# EAGLE board acdc (EAGLE 7.2.0)
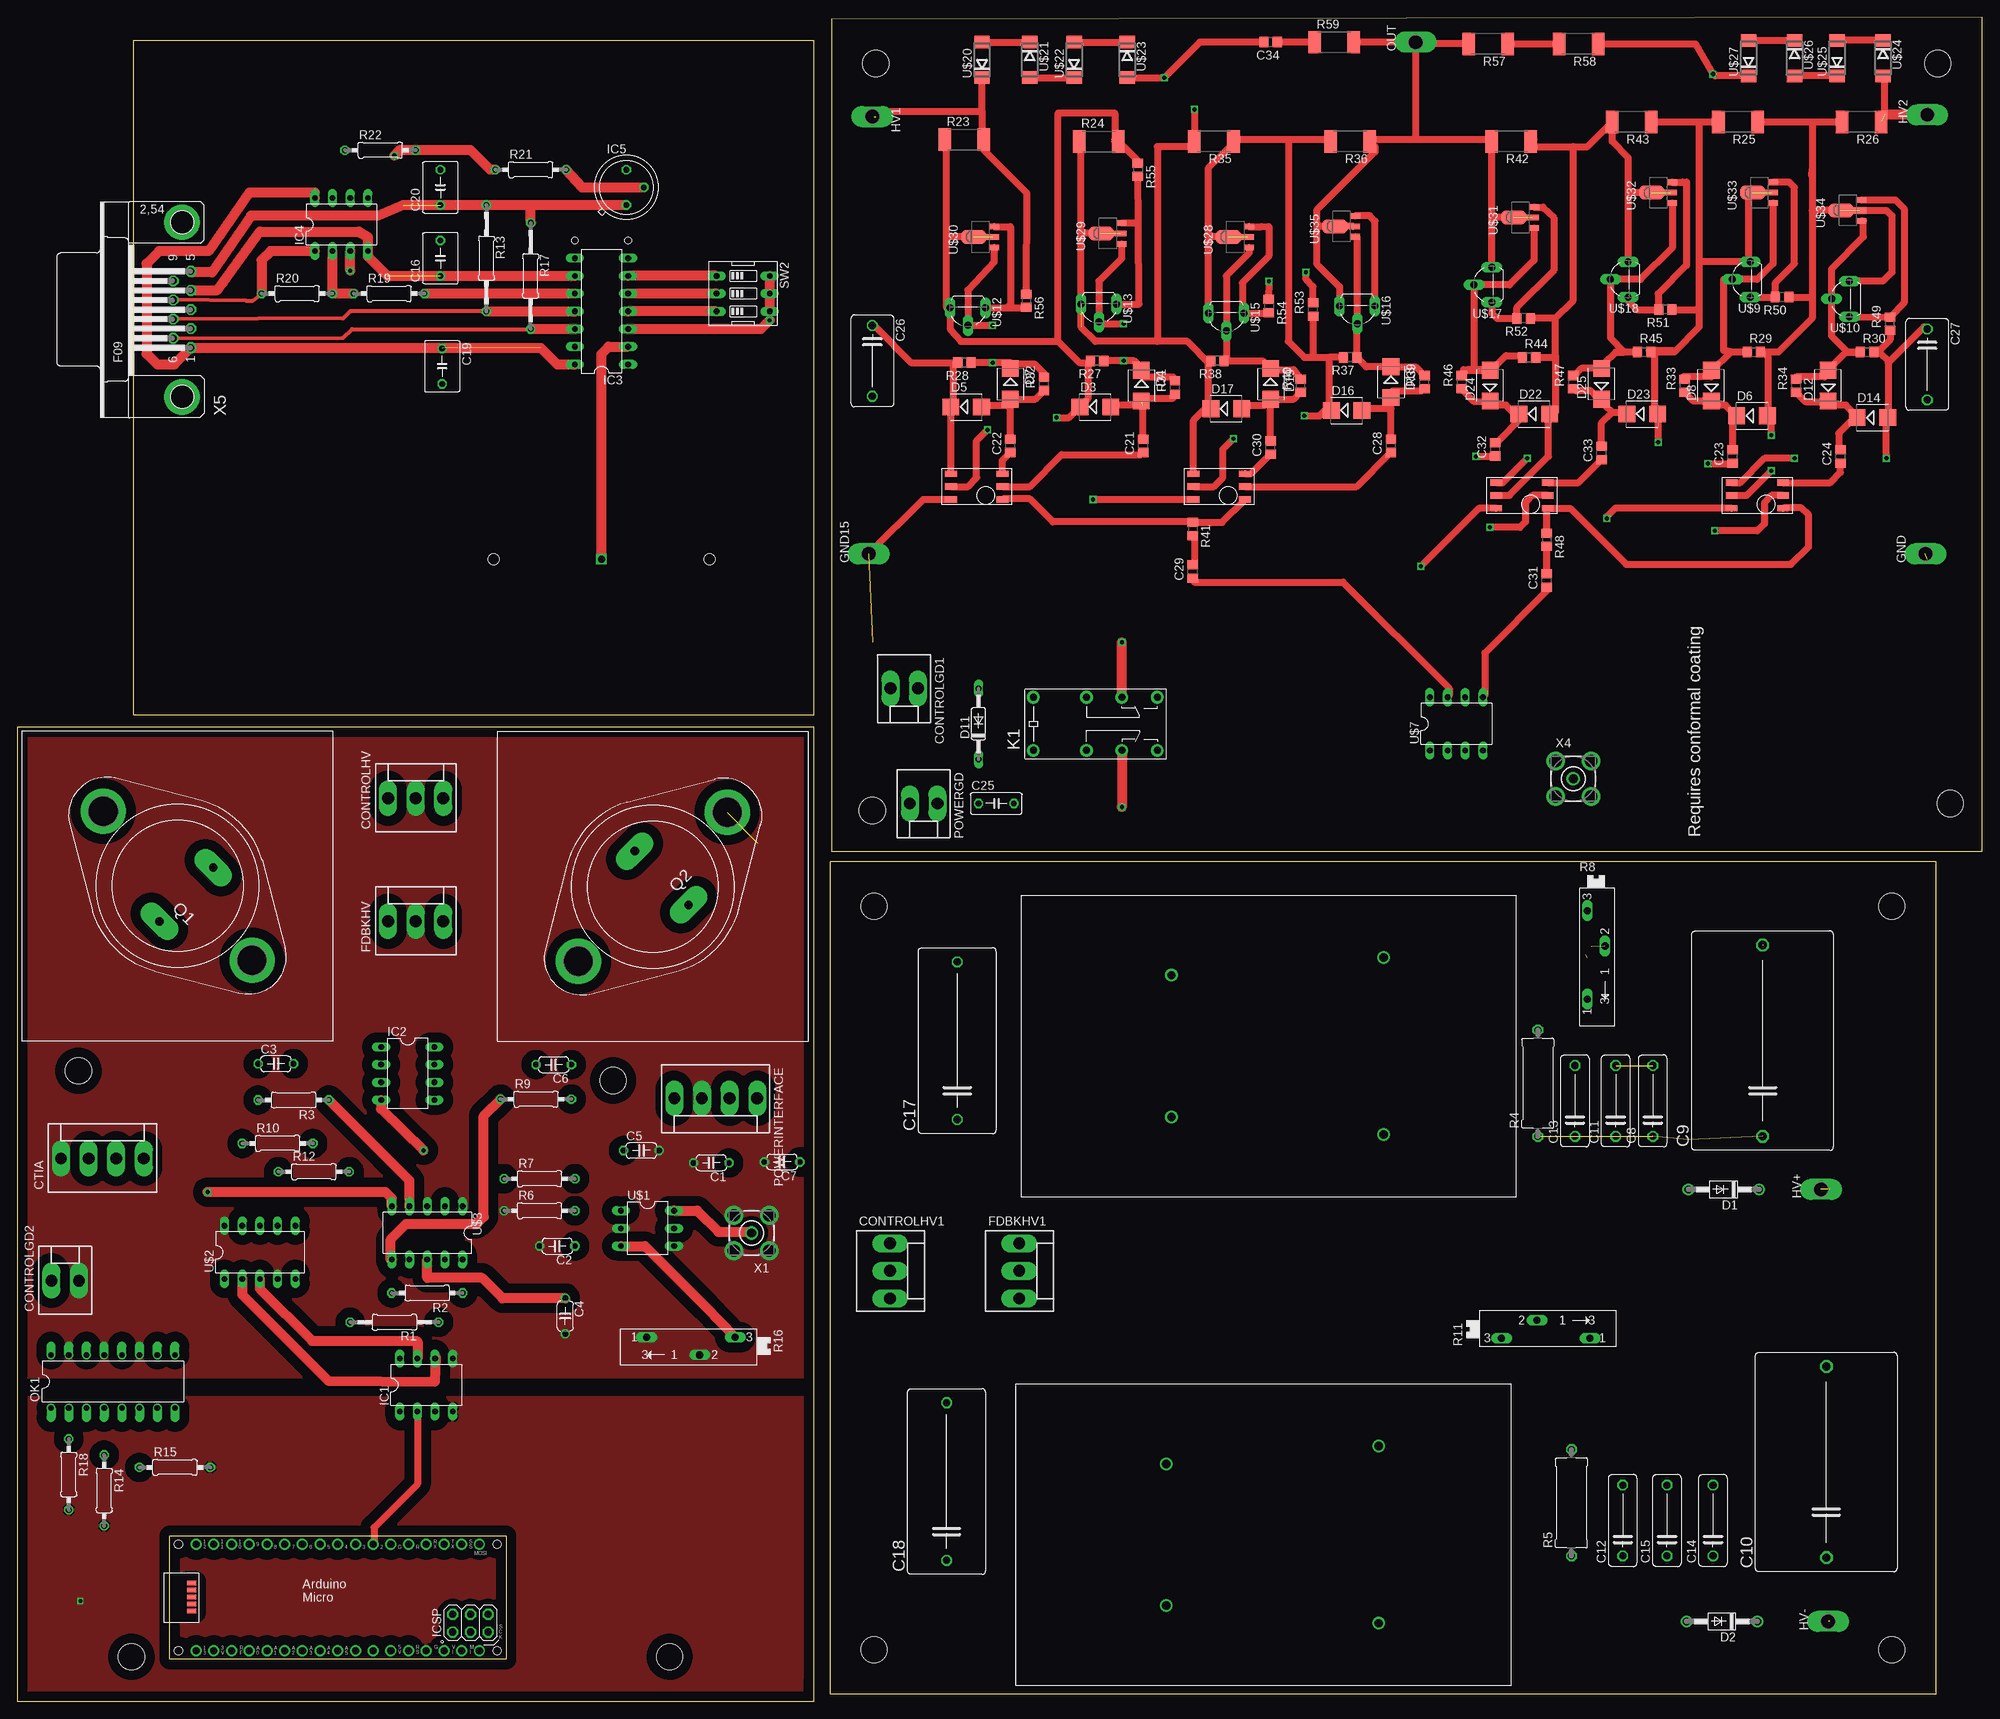
[diagram p0: board, top side]
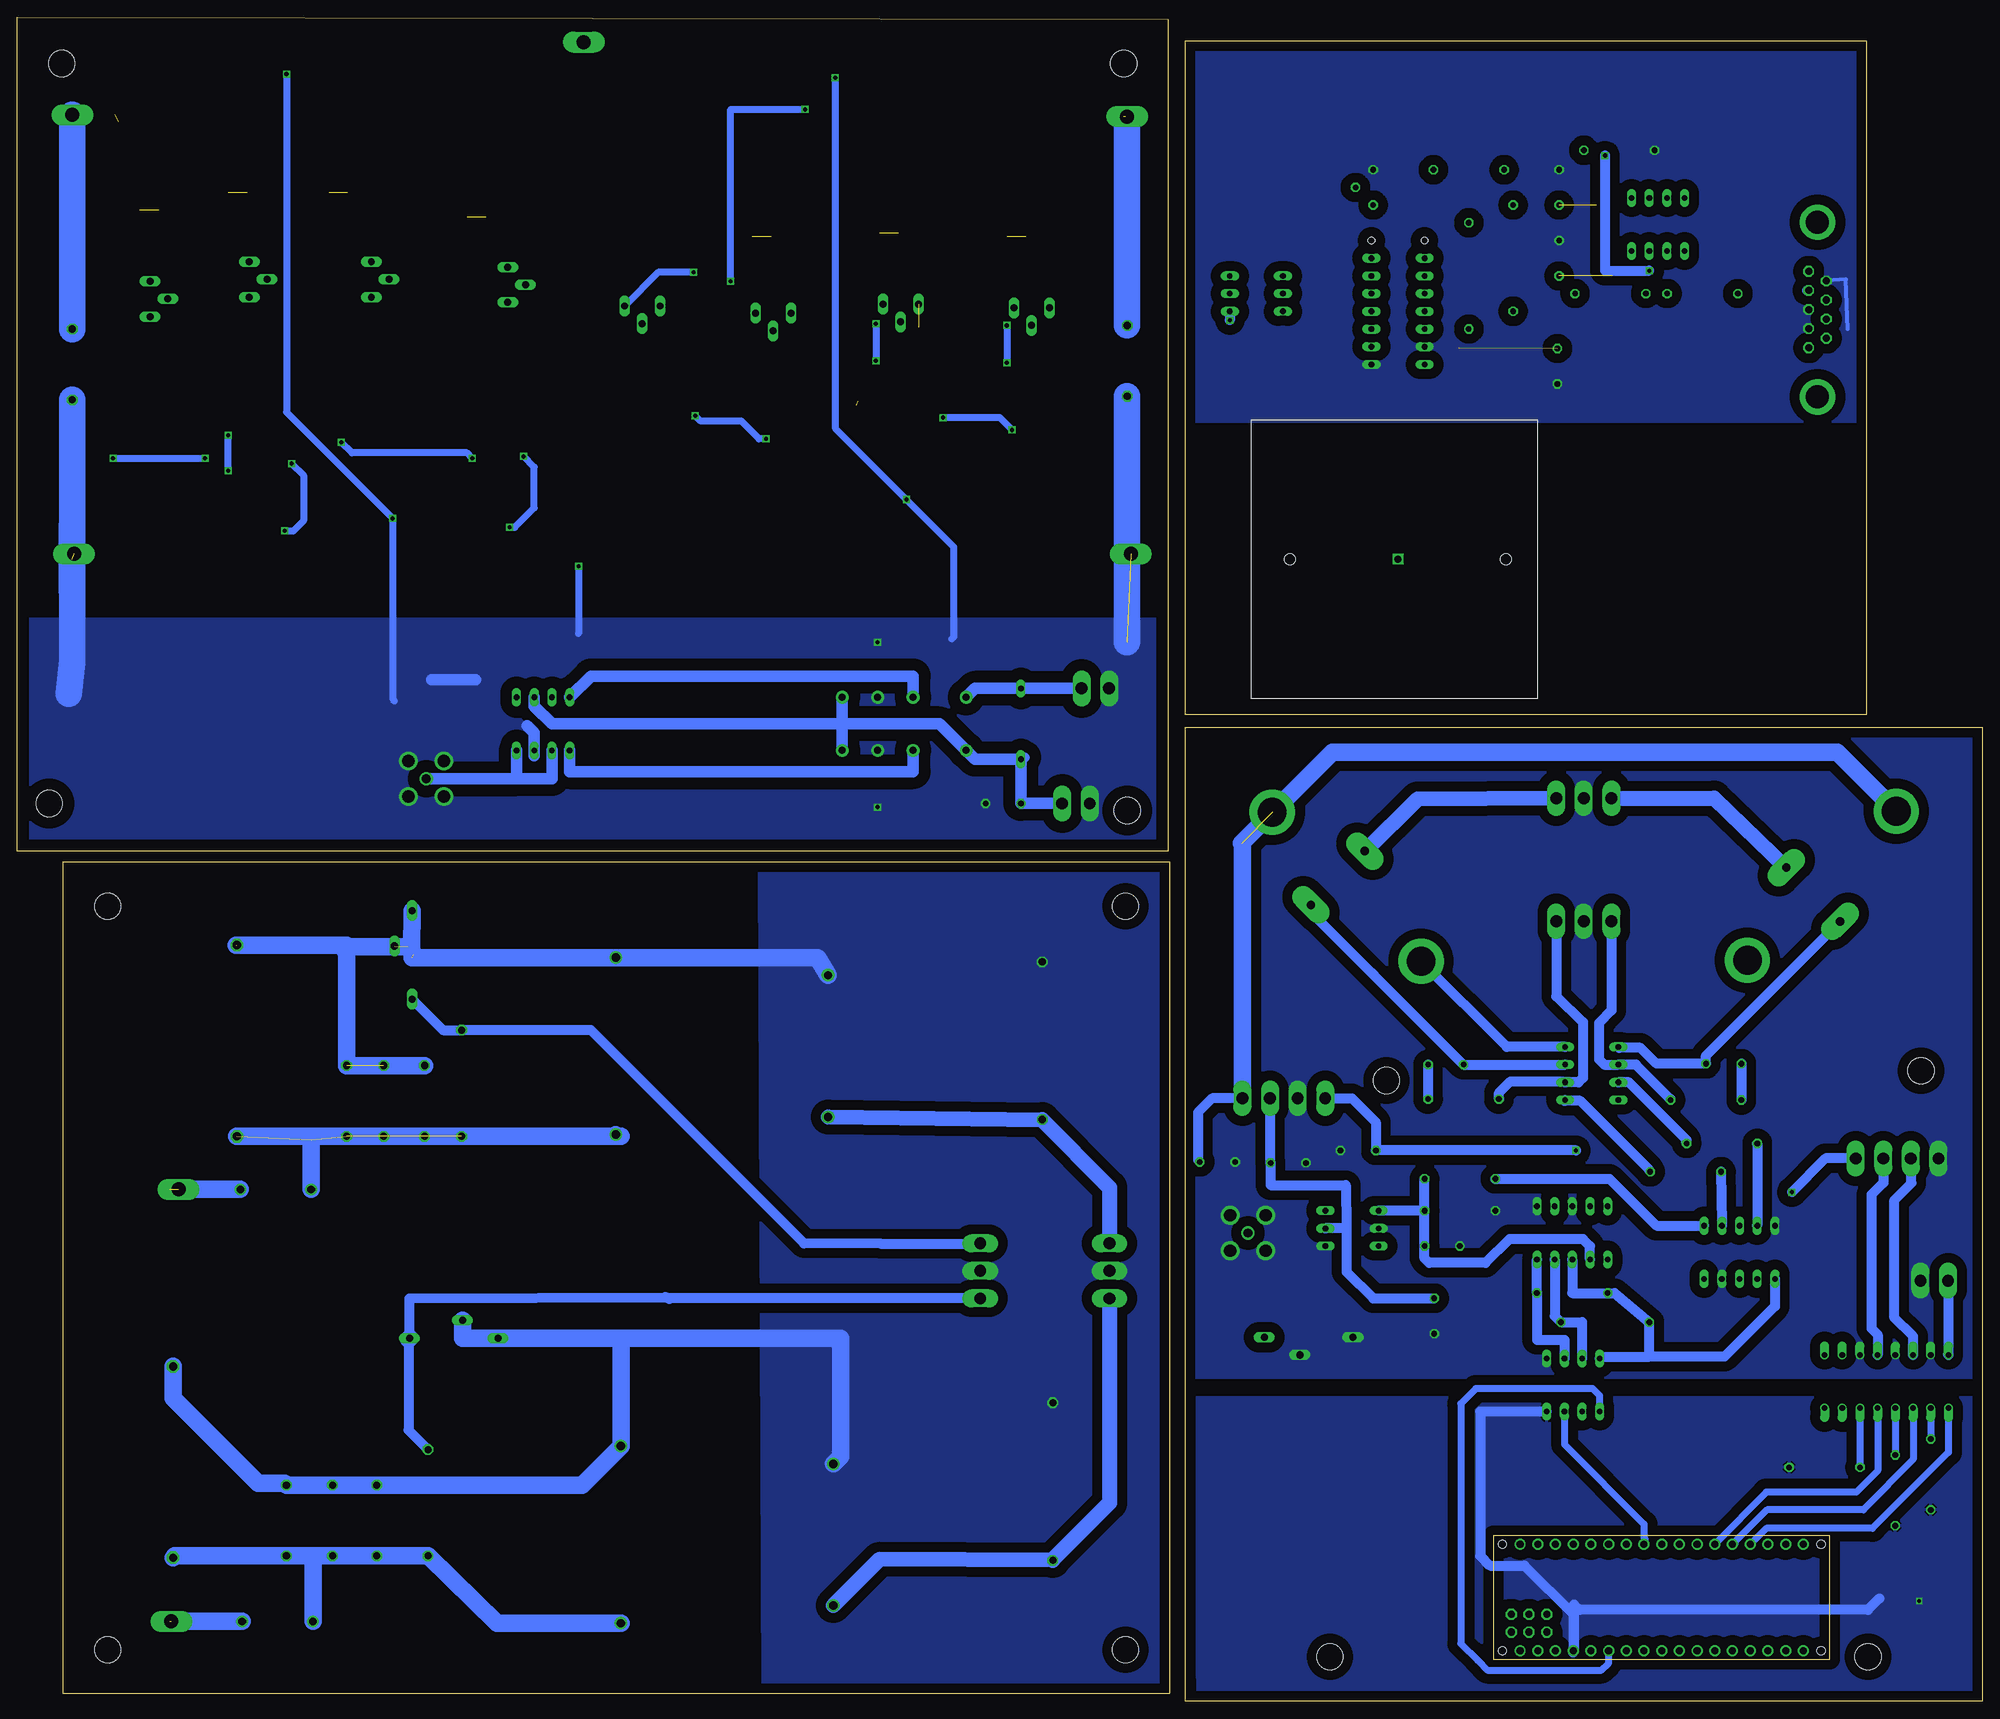
[diagram p1: board, bottom side, seen from below]

Size 281.94 x 241.55 mm. Coordinates in mm from the lower left corner, seen from the top.
Outline: 0,0 114.3,0 114.3,139.7 0,139.7 0,0
Outline: 116.59,1.02 275.34,1.02 275.34,120.4 116.59,120.4 116.59,1.02
Outline: 114.3,141.48 114.3,238.23 16.59,238.23 16.59,141.48 114.3,141.48
Outline: 281.94,121.92 281.94,241.55 116.84,241.3 116.84,121.92 281.94,121.92
Copper layers (1*16): Top 0.035mm / dielectric 1.5mm / Bottom 0.035mm
Design rules "default": minimum track width 10mil, minimum drill 24mil, track to track 8mil, track to pad 8mil, pad to pad 8mil, via to via 8mil, smd to smd 8mil, copper to edge 40mil, drill to drill 8mil, minimum pad ring 10mil, minimum via ring 8mil, stop-mask expansion 4mil, vias tented up to drill 0mil, thermal gap 10mil
Holes 3.8 mm at 93.6,6.35 16.38,6.35 8.76,90.42 85.47,89.03 268.99,7.37 268.99,114.05 122.94,7.37 122.94,114.05 123.19,234.95 275.59,234.95 277.37,128.78 122.68,127.76
Holes 1 mm at 80.01,209.55 87.63,209.55

## Footprints (pad centres in the part's own frame; a part is rotated, then mirrored left to right if it is on the bottom)
C050-024X044 = drill 0.813 octagon: 1 -2.54,0; 2 2.54,0
C102-043X133 = drill 1.016 octagon: 1 -5.08,0; 2 5.08,0
C275-205X316 = drill 1.194 octagon: 1 -13.716,0; 2 13.716,0
C050-050X075 = drill 0.813 octagon: 1 -2.54,0; 2 2.54,0
C225-113X268 = drill 1.016 octagon: 1 -11.303,0; 2 11.303,0
C0805 = smd 1.3 x 1.5: 1 -0.95,0; 2 0.95,0
C050-030X075 = drill 0.813 octagon: 1 -2.54,0; 2 2.54,0
C102-064X133 = drill 1.016 octagon: 1 -5.08,0; 2 5.08,0
KK-156-2 = drill 1.7 pad 2.184 long: 1 -1.98,0; 2 1.98,0
KK-156-3 = drill 1.7 pad 2.184 long: 1 -3.96,0; 2 0,0; 3 3.96,0
KK-156-4 = drill 1.7 pad 2.184 long: 1 -5.94,0; 2 -1.98,0; 3 1.98,0; 4 5.94,0
DO41-10 = drill 1.118: A 5.08,0; C -5.08,0
SMB = smd 2.4 x 2.4: A 2.2,0; C -2.2,0
DO35-10 = drill 0.813 long: A 5.08,0; C -5.08,0
P1-20Y = drill 2.007 pad 2.54 long: TP 0,0
DIL08 = drill 0.813 long: 1 -3.81,-3.81; 2 -1.27,-3.81; 3 1.27,-3.81; 4 3.81,-3.81; 5 3.81,3.81; 6 1.27,3.81; 7 -1.27,3.81; 8 -3.81,3.81
DIL14 = drill 0.813 long: 1 -7.62,-3.81; 2 -5.08,-3.81; 3 -2.54,-3.81; 4 0,-3.81; 5 2.54,-3.81; 6 5.08,-3.81; 7 7.62,-3.81; 8 7.62,3.81; 9 5.08,3.81; 10 2.54,3.81; 11 0,3.81; 12 -2.54,3.81; 13 -5.08,3.81; 14 -7.62,3.81
TO39 = drill 0.813 octagon: 1 0,-2.54; 2 2.54,0; 3 0,2.54
G5V-2 = drill 1 pad 1.8: 1 -8.89,-3.81; 4 -1.27,-3.81; 6 3.81,-3.81; 8 8.89,-3.81; 9 8.89,3.81; 11 3.81,3.81; 13 -1.27,3.81; 16 -8.89,3.81
DIL16 = drill 0.813 offset: 1 -8.89,-3.81; 2 -6.35,-3.81; 3 -3.81,-3.81; 4 -1.27,-3.81; 5 1.27,-3.81; 6 3.81,-3.81; 7 6.35,-3.81; 8 8.89,-3.81; 9 8.89,3.81; 10 6.35,3.81; 11 3.81,3.81; 12 1.27,3.81; 13 -1.27,3.81; 14 -3.81,3.81; 15 -6.35,3.81; 16 -8.89,3.81
ARDUINO_MICRO = drill 1.016 pad 1.575: 3V3 6.35,1.27; +5V 31.75,1.27; A0 11.43,1.27; A1 13.97,1.27; A2 16.51,1.27; A3 19.05,1.27; A4 21.59,1.27; A5 24.13,1.27; D2 29.21,16.51; D3 26.67,16.51; D4 24.13,16.51; D5 21.59,16.51; D6 19.05,16.51; D7 16.51,16.51; D8 13.97,16.51; D9 11.43,16.51; D10 8.89,16.51; D11 6.35,16.51; D12 3.81,16.51; D13 3.81,1.27; GND 31.75,16.51; GND. 36.83,1.27; MISO] 41.91,1.27; MOSI 44.45,16.51; NC 26.67,1.27; NC. 29.21,1.27; REF 8.89,1.27; RST 34.29,16.51; RST. 34.29,1.27; RX1 36.83,16.51; SCK 44.45,1.27; SS 41.91,16.51; TX1 39.37,16.51; VIN 39.37,1.27 | drill 1.016 pad 1.575 octagon: 5V 40.64,6.477; GND_ 45.72,6.477; MISO. 40.64,3.937; MOSI. 43.18,6.477; RESET.. 45.72,3.937; SCK. 43.18,3.937 | smd 1.27 x 0.635: <USB>+V 3.15,10.947; <USB>D+ 3.15,9.957; <USB>D- 3.15,8.941; <USB>GND 3.15,6.96; <USB>ID 3.15,7.976 | hole 1.2: 1.27,1.27; 1.27,16.51; 46.99,16.51; 46.99,1.27
TO3 = drill 1.194 pad 3.15 long: B -1.778,5.461; E -1.778,-5.461 | drill 4.115 pad 6.477: C 15.113,0; C/ -15.113,0
0207/12 = drill 0.813 octagon: 1 -6.35,0; 2 6.35,0
0207/10 = drill 0.813 octagon: 1 -5.08,0; 2 5.08,0
P0613/15 = drill 1.016 octagon: 1 -7.62,0; 2 7.62,0
SP19L = drill 1.016 long: A 5.715,-1.27; E -6.985,-1.27; S -1.905,1.27
0207/15 = drill 0.813 octagon: 1 -7.62,0; 2 7.62,0
R2512 = smd 1.8 x 3.2: 1 -2.8,0; 2 2.8,0
R0805 = smd 1.3 x 1.5: 1 -0.95,0; 2 0.95,0
EDG-03 = drill 0.813 long: 1 -2.54,-3.81; 2 0,-3.81; 3 2.54,-3.81; 4 2.54,3.81; 5 0,3.81; 6 -2.54,3.81
DIL06 = drill 0.813 long: DIV 2.54,3.81; GND 0,-3.81; MOD -2.54,-3.81; OUT -2.54,3.81; SET 2.54,-3.81; VCC 0,3.81
DIL10 = drill 0.813 long: 1 -5.08,-3.81; 2 -2.54,-3.81; 3 0,-3.81; 4 2.54,-3.81; 5 5.08,-3.81; 6 5.08,3.81; 7 2.54,3.81; 8 0,3.81; 9 -2.54,3.81; 10 -5.08,3.81
EMCO-F = drill 1.2: P$1 0,0; P$2 0,20.32; P$3 30.48,-2.54; P$4 30.48,22.86
CTIA = drill 1 square: P$1 0,0 | hole 1.6: 15.5,0; -15.5,0
SMD6 = smd 1.676 x 0.889: P$1 -3.696,1.854; P$2 -3.696,0; P$3 -3.696,-1.854; P$4 3.696,-1.854; P$5 3.696,0; P$6 3.696,1.854
TO92L = drill 1 long: 1 0,-2.54; 2 2.54,0; 3 0,2.54
DO214AA = smd 1.8 x 2.2: A 2.55,0; C -2.55,0
SOT89-BCE = smd 0.8 x 1.4: B -1.499,-1.981; E 1.499,-1.981 | smd 0.8 x 1.9: C 0,-1.727 | smd 2.032 x 3.65: C@1 0,0.94
BU-SMA-V = drill 1.27: 1 0,0 | drill 1.778: 2 -2.55,2.55; 3 2.55,2.55; 4 2.55,-2.55; 5 -2.55,-2.55
F09HP = drill 1.016 octagon: 1 -5.486,-1.27; 2 -2.743,-1.27; 3 0,-1.27; 4 2.743,-1.27; 5 5.486,-1.27; 6 -4.115,1.27; 7 -1.372,1.27; 8 1.372,1.27; 9 4.115,1.27 | drill 3.302 pad 5.08: G1 -12.522,0; G2 12.522,0

## Placement (x,y rotation side)
C1  10n  [C050-024X044]  99.57,77.22 180 top
C2  10n  [C050-024X044]  77.47,65.28 180 top
C3  10n  [C050-024X044]  37.08,91.44 0 top
C4  10n  [C050-024X044]  78.61,55.24 270 top
C5  10n  [C050-024X044]  89.53,78.99 0 top
C6  10n  [C050-024X044]  76.96,91.31 180 top
C7  10n  [C050-024X044]  109.73,77.34 180 top
C8  .01u  [C102-043X133]  234.7,86.11 90 top
C9  1u  [C275-205X316]  250.44,94.74 90 top
C10  1u  [C275-205X316]  259.59,34.29 90 top
C11  1n  [C102-043X133]  229.36,86.11 90 top
C12  .01u  [C102-043X133]  230.38,25.91 90 top
C13  10p  [C102-043X133]  223.52,86.11 90 top
C14  1n  [C102-043X133]  243.33,25.91 90 top
C15  10p  [C102-043X133]  236.73,25.91 90 top
C16  10n  [C050-050X075]  60.71,207.01 90 top
C17  .1u  [C225-113X268]  134.87,94.74 90 top
C18  .1u  [C225-113X268]  133.35,31.5 90 top
C19  10n  [C050-050X075]  60.96,191.52 270 top
C20  10n  [C050-050X075]  60.71,217.17 90 top
C21  1u  [C0805]  161.54,180.09 90 top
C22  1u  [C0805]  142.49,180.09 90 top
C23  1u  [C0805]  246.13,178.56 90 top
C24  1u  [C0805]  261.62,178.56 90 top
C25  10n  [C050-030X075]  140.46,128.78 0 top
C26  10p  [C102-064X133]  122.68,192.28 270 top
C27  10p  [C102-064X133]  274.07,191.77 270 top
C28  1u  [C0805]  197.1,180.09 90 top
C29  1u  [C0805]  168.66,162.05 90 top
C30  1u  [C0805]  179.83,179.83 90 top
C31  1u  [C0805]  219.46,160.78 90 top
C32  1u  [C0805]  212.09,179.58 90 top
C33  1u  [C0805]  227.33,179.07 90 top
C34  10n  [C0805]  179.83,238 180 top
CONTROLGD1  [KK-156-2]  127.25,145.29 180 top
CONTROLGD2  [KK-156-2]  6.86,60.33 0 top
CONTROLHV  [KK-156-3]  57.15,129.54 0 top
CONTROLHV1  [KK-156-3]  125.22,61.72 270 top
CTIA  [KK-156-4]  12.19,77.85 0 top
D1  1N4004  [DO41-10]  244.86,73.41 180 top
D2  1N4004  [DO41-10]  244.6,11.43 180 top
D3  1SMB5918BT3G  [SMB]  154.69,185.67 0 top
D4  [SMB]  161.29,188.72 270 top
D5  1SMB5918BT3G  [SMB]  136.14,185.67 0 top
D6  1SMB5918BT3G  [SMB]  248.92,184.4 0 top
D7  [SMB]  142.49,188.98 270 top
D8  [SMB]  243.08,188.72 90 top
D11  1N4148DO35-10  [DO35-10]  137.92,140.21 90 top
D12  [SMB]  259.84,188.72 90 top
D14  1SMB5918BT3G  [SMB]  266.19,184.15 0 top
D16  1SMB5918BT3G  [SMB]  190.75,185.17 0 top
D17  1SMB5918BT3G  [SMB]  173.48,185.42 0 top
D18  [SMB]  197.1,189.23 270 top
D19  [SMB]  179.83,188.98 270 top
D22  1SMB5918BT3G  [SMB]  217.68,184.66 0 top
D23  1SMB5918BT3G  [SMB]  233.17,184.66 0 top
D24  [SMB]  211.33,188.72 90 top
D25  [SMB]  227.33,188.98 90 top
FDBKHV  [KK-156-3]  57.15,111.89 0 top
FDBKHV1  [KK-156-3]  143.76,61.72 270 top
GND  TPPAD1-20Y  [P1-20Y]  273.81,164.59 90 top
GND15  TPPAD1-20Y  [P1-20Y]  122.17,164.59 90 top
HV1  TPPAD1-20Y  [P1-20Y]  122.68,227.33 270 top
HV2  TPPAD1-20Y  [P1-20Y]  274.07,227.58 90 top
HV+  TPPAD1-20Y  [P1-20Y]  258.83,73.41 90 top
HV-  TPPAD1-20Y  [P1-20Y]  259.84,11.43 90 top
IC1  ISO1540  [DIL08]  58.67,45.34 0 top
IC2  LT1352PA  [DIL08]  56.01,90.04 270 top
IC3  IVC102UADAPTOR  [DIL14]  83.82,199.39 90 top
IC4  LT1352PA  [DIL08]  46.48,211.84 0 top
IC5  AD580H  [TO39]  87.38,217.17 0 top
K1  G5V-2  [G5V-2]  154.69,140.21 0 top
OK1  PS2501"  [DIL16]  13.72,45.85 0 top
OUT  TPPAD1-20Y  [P1-20Y]  200.66,238 90 top
PCB1  ARDUINO_MICRO  [ARDUINO_MICRO]  21.84,5.97 0 top
POWERGD  [KK-156-2]  130.05,128.78 180 top
POWERINTERFACE  [KK-156-4]  100.2,86.49 180 top
Q1  2N3055  [TO3]  22.99,116.97 135 top
Q2  2N3055  [TO3]  91.19,116.84 225 top
R1  10k  [0207/12]  54.1,54.36 180 top
R2  10k  [0207/10]  58.8,58.55 180 top
R3  10k  [0207/10]  39.62,86.23 180 top
R4  2M  [P0613/15]  218.19,88.65 90 top
R5  2M  [P0613/15]  223.01,28.45 90 top
R6  10k  [0207/10]  74.93,70.36 0 top
R7  40k  [0207/10]  74.93,74.93 0 top
R8  [SP19L]  226.57,106.43 270 top
R9  10k  [0207/10]  74.42,86.36 0 top
R10  10k  [0207/10]  37.34,80.01 0 top
R11  [SP19L]  219.96,53.34 0 top
R12  10k  [0207/10]  42.55,75.95 0 top
R13  10k  [0207/15]  67.31,207.01 270 top
R14  100  [0207/10]  12.45,30.23 270 top
R15  100  [0207/10]  22.61,33.53 0 top
R16  100k  [SP19L]  96.01,50.93 180 top
R17  10k  [0207/15]  73.66,204.47 270 top
R18  100  [0207/10]  7.37,32.51 270 top
R19  10k  [0207/10]  53.34,201.93 0 top
R20  1.5M  [0207/10]  40.13,201.93 0 top
R21  1.5M  [0207/10]  73.66,219.71 0 top
R22  10k  [0207/10]  52.07,222.5 0 top
R23  10M  [R2512]  135.89,224.03 0 top
R24  10M  [R2512]  155.19,223.77 0 top
R25  10M  [R2512]  246.89,226.57 180 top
R26  10M  [R2512]  264.67,226.57 180 top
R27  100k  [R0805]  154.94,192.28 180 top
R28  100k  [R0805]  135.89,192.02 180 top
R29  100k  [R0805]  249.17,193.55 0 top
R30  100k  [R0805]  265.43,193.55 0 top
R31  10  [R0805]  166.12,188.47 90 top
R32  10  [R0805]  147.32,188.98 90 top
R33  10  [R0805]  239.27,188.72 90 top
R34  10  [R0805]  255.27,188.72 90 top
R35  10M  [R2512]  171.7,223.77 180 top
R36  10M  [R2512]  191.26,223.77 180 top
R37  100k  [R0805]  191.26,192.79 180 top
R38  100k  [R0805]  172.21,192.28 180 top
R39  10  [R0805]  201.93,189.23 90 top
R40  10  [R0805]  184.15,188.72 90 top
R41  10  [R0805]  168.66,168.15 270 top
R42  10M  [R2512]  214.38,223.77 180 top
R43  10M  [R2512]  231.65,226.57 180 top
R44  100k  [R0805]  216.92,192.79 0 top
R45  100k  [R0805]  233.43,193.55 0 top
R46  10  [R0805]  207.26,189.23 90 top
R47  10  [R0805]  223.27,189.23 90 top
R48  10  [R0805]  219.46,166.62 270 top
R49  6.67  [R0805]  268.73,197.61 90 top
R50  6.67  [R0805]  253.24,201.42 180 top
R51  6.67  [R0805]  236.47,199.64 180 top
R52  6.67  [R0805]  216.15,198.37 180 top
R53  1.25  [R0805]  185.93,199.64 90 top
R54  1.25  [R0805]  179.58,200.15 270 top
R55  1.25  [R0805]  160.78,219.71 270 top
R56  1.25  [R0805]  144.78,200.91 270 top
R57  10M  [R2512]  211.07,237.74 180 top
R58  10M  [R2512]  224.03,237.74 180 top
R59  10M  [R2512]  188.98,238 0 top
SW2  [EDG-03]  104.14,201.93 270 top
U$1  LTC6992  [DIL06]  90.42,67.82 270 top
U$2  MCP4728DIL  [DIL10]  34.8,64.39 0 top
U$3  ADS1015DIL  [DIL10]  58.8,67.18 180 top
U$4  EMCO-F104PIN  [EMCO-F]  165.61,83.82 0 top
U$5  EMCO-F104PIN  [EMCO-F]  164.85,13.72 0 top
U$6  CTIA  [CTIA]  83.82,163.83 0 bottom
U$7  UCC27425  [DIL08]  206.5,140.21 0 top
U$8  DA-2320SMD6  [SMD6]  137.67,174.24 180 top
U$9  VN0550L  [TO92L]  248.67,203.96 180 top
U$10  VN0550L  [TO92L]  262.89,201.17 180 top
U$11  DA-2320SMD6  [SMD6]  249.68,172.97 180 top
U$12  VP0550L  [TO92L]  136.4,199.9 270 top
U$13  VP0550L  [TO92L]  155.19,200.41 270 top
U$14  DA-2320SMD6  [SMD6]  172.47,174.24 180 top
U$15  VP0550L  [TO92L]  173.48,199.14 270 top
U$16  VP0550L  [TO92L]  192.28,200.15 270 top
U$17  VN0550L  [TO92L]  211.58,203.2 180 top
U$18  VN0550L  [TO92L]  231.14,203.96 180 top
U$19  DA-2320SMD6  [SMD6]  215.9,172.97 180 top
U$20  SMBJ170D-M3/H  [DO214AA]  138.43,235.46 90 top
U$21  SMBJ170D-M3/H  [DO214AA]  145.29,235.46 270 top
U$22  SMBJ170D-M3/H  [DO214AA]  151.64,235.46 90 top
U$23  SMBJ170D-M3/H  [DO214AA]  159.26,235.46 270 top
U$24  SMBJ170D-M3/H  [DO214AA]  267.72,235.71 270 top
U$25  SMBJ170D-M3/H  [DO214AA]  261.11,235.71 90 top
U$26  SMBJ170D-M3/H  [DO214AA]  255.02,235.71 270 top
U$27  SMBJ170D-M3/H  [DO214AA]  248.41,235.71 90 top
U$28  VP2450  [SOT89-BCE]  174.75,210.06 90 top
U$29  VP2450  [SOT89-BCE]  156.46,210.57 90 top
U$30  VP2450  [SOT89-BCE]  138.18,210.06 90 top
U$31  VN2450  [SOT89-BCE]  215.65,212.85 90 top
U$32  VN2450  [SOT89-BCE]  235.46,216.41 90 top
U$33  VN2450  [SOT89-BCE]  249.94,216.41 90 top
U$34  VN2450  [SOT89-BCE]  262.64,213.87 90 top
U$35  VP2450  [SOT89-BCE]  189.99,211.58 90 top
X1  BU-SMA-V  [BU-SMA-V]  105.36,67.16 180 top
X4  BU-SMA-V  [BU-SMA-V]  223.27,132.33 0 top
X5  [F09HP]  23.62,199.64 90 top

## Library data of the parts
C1 C8-C20 C25 R14 R15 R18 R23-R59 = rcl
C2-C7 C21-C24 C26-C34 R1-R7 R9 R10 R12 R13 R17 R19-R22 = resistor
CONTROLGD1 CONTROLGD2 CONTROLHV CONTROLHV1 CTIA FDBKHV FDBKHV1 POWERGD POWERINTERFACE = con-molex; OC_FARNELL: unknown; OC_NEWARK: unknown
D1-D8 D11 D12 D14 D16-D19 D22-D25 U$20-U$27 = diode
GND GND15 HV1 HV2 HV+ HV- OUT = testpad
IC1 U$3 U$7 = texas
IC2 IC4 = linear-technology; OC_FARNELL: unknown; OC_NEWARK: unknown
IC3 = burr-brown
IC5 = linear
K1 = relay; MPN: G5V-2 5DC; OC_FARNELL: 9949488; OC_NEWARK: 78K5703
OK1 = optocoupler
PCB1 = E14_Arduino_published
Q1 Q2 = transistor-npn
R8 R11 R16 = pot
SW2 = special
U$1 = linear-technology
U$2 = microchip
U$4 U$5 = dc-dc-converter
U$6 = ctia
U$8 U$11 U$14 U$19 = trafo
U$9 U$10 U$12 U$13 U$15-U$18 U$28-U$35 = transistor-fet
X1 X4 = con-coax; OC_FARNELL: unknown; OC_NEWARK: unknown
X5 = con-subd; OC_FARNELL: unknown; OC_NEWARK: unknown

## Nets
+5V: C20.1 IC5.1 R13.1 R17.1 X5.5
+15V: C7.1 IC2.8 POWERINTERFACE.1 Q1.C Q1.C/ Q2.C Q2.C/
+15V1: C19.1 IC3.14 IC4.8 X5.1
+15V2: C25.1 D11.C K1.1 K1.8 K1.9 POWERGD.1 U$7.6
-15V: C5.1 IC2.4 POWERINTERFACE.4
-15V1: C16.1 IC3.9 IC4.4 X5.4
A+5: IC1.1 PCB1.+5V
AGND: IC1.4 PCB1.GND. R14.2 R15.2 R18.2
CTIA: CTIA.4 U$3.5
D4: PCB1.D4
D7: OK1.5 PCB1.D7
D8: OK1.3 PCB1.D8
D10: PCB1.D10
D11: PCB1.D11
ENSW: CONTROLGD1.1 D11.A K1.16
ENSW2: CONTROLGD2.1 OK1.16
GND: C1.2 C2.2 C4.2 C5.2 C7.2 CONTROLGD2.2 CONTROLHV.2 CTIA.1 FDBKHV.2 IC1.5 OK1.11 OK1.13 OK1.15 POWERINTERFACE.3 R6.1 R16.A R16.S U$1.DIV U$1.GND U$2.4 U$2.10 U$3.1 U$3.3 X1.2 X1.3 X1.4 X1.5
GND1: C8.2 C9.2 C10.2 C11.2 C12.2 C13.2 C14.2 C15.2 C17.2 C18.2 CONTROLHV1.2 FDBKHV1.2 R8.E R8.S R11.E R11.S U$4.P$2 U$4.P$4 U$5.P$2 U$5.P$4
GND2: C16.2 C19.2 C20.2 IC3.1 IC3.13 IC5.3 R22.1 X5.2 X5.3 X5.9
GND3: C25.2 C26.2 C27.2 C34.2 CONTROLGD1.2 GND15.TP GND.TP K1.6 K1.11 POWERGD.2 R58.1 U$7.3 U$8.P$6 U$11.P$6 U$14.P$6 U$19.P$6 U$23.A U$27.C X4.2 X4.3 X4.4 X4.5
N$1: R7.1 U$2.6
N$2: OK1.4 R14.1
N$3: C3.1 R3.2
N$4: CONTROLHV.1 Q1.E
N$5: CONTROLHV.3 Q2.E
N$6: OK1.6 R15.1
N$7: OK1.2 R18.1
N$8: C8.1 C9.1 C11.1 C13.1 D1.A R4.1 U$4.P$3
N$9: C10.1 C12.1 C14.1 C15.1 D2.A R5.1 U$5.P$3
N$10: FDBKHV1.1 R4.2 R8.A
N$11: FDBKHV1.3 R5.2 R11.A
N$12: R16.E U$1.SET
N$13: U$1.OUT X1.1
N$14: D1.C HV+.TP
N$15: C17.1 CONTROLHV1.1 U$4.P$1
N$16: IC2.3 R10.2
N$17: C18.1 CONTROLHV1.3 U$5.P$1
N$18: IC2.5 R12.2
N$19: C3.2 IC2.1 Q1.B
N$20: C6.1 R9.2
N$21: C6.2 IC2.7 Q2.B
N$23: D2.C HV-.TP
N$24: R10.1 U$2.9
N$25: R12.1 U$2.7
N$26: U$2.8
N$27: IC3.6 SW2.1
N$28: IC3.5 SW2.2
N$29: IC3.4 SW2.3
N$30: IC3.3 SW2.4 SW2.5 SW2.6
N$31: IC3.10 R19.2
N$32: IC4.2 R19.1 R20.2
N$33: IC4.3 R21.1 R22.2
N$34: IC5.2 R21.2
N$35: U$7.2 U$7.4 X4.1
N$36: C29.1 U$7.7
N$37: C31.1 U$7.5
N$38: K1.4 U$7.1
N$39: K1.13 U$7.8
N$40: C21.1 U$8.P$2
N$41: C22.1 U$8.P$3
N$42: C23.1 U$11.P$2
N$43: C24.1 U$11.P$3
N$44: C23.2 D6.C D8.C R33.1
N$45: C24.2 D12.C D14.C R34.1
N$46: C22.2 D5.A D7.A R32.1
N$47: C26.1 D5.C HV1.TP R23.2 R28.2 R56.1 U$8.P$4 U$20.C
N$48: D6.A R25.1 R26.2 R29.2 R50.1 U$10.1 U$11.P$5 U$34.C U$34.C@1
N$49: D3.C R23.1 R24.2 R27.2 R55.1 U$8.P$5 U$12.1 U$30.C U$30.C@1
N$50: D4.C R27.1 R31.2 U$13.2 U$29.B
N$51: C21.2 D3.A D4.A R31.1
N$52: D12.A R30.1 R34.2 U$10.2 U$34.B
N$53: D7.C R28.1 R32.2 U$12.2 U$30.B
N$54: C27.1 D14.A HV2.TP R26.1 R30.2 R49.1 U$11.P$4 U$24.A
N$55: C28.1 U$14.P$2
N$56: C30.1 U$14.P$3
N$57: C30.2 D17.A D19.A R40.1
N$58: D16.C R35.1 R36.2 R37.2 R53.1 U$14.P$5 U$15.1 U$28.C U$28.C@1
N$59: D18.C R37.1 R39.2 U$16.2 U$35.B
N$60: C28.2 D16.A D18.A R39.1
N$61: D19.C R38.1 R40.2 U$15.2 U$28.B
N$62: R41.1 U$8.P$1 U$14.P$1
N$63: C29.2 R41.2
N$64: C32.1 U$19.P$2
N$65: C33.1 U$19.P$3
N$66: C32.2 D22.C D24.C R46.1
N$67: C33.2 D23.C D25.C R47.1
N$68: D22.A R42.1 R43.2 R44.2 R52.1 U$18.1 U$19.P$5 U$32.C U$32.C@1
N$69: D25.A R45.1 R47.2 U$18.2 U$32.B
N$70: R48.1 U$11.P$1 U$19.P$1
N$71: C31.2 R48.2
N$72: D24.A R44.1 R46.2 U$17.2 U$31.B
N$73: D23.A R25.2 R43.1 R45.2 R51.1 U$9.1 U$19.P$4 U$33.C U$33.C@1
N$74: OUT.TP R36.1 R42.2 R57.2 R59.2 U$16.1 U$17.1 U$31.C U$31.C@1 U$35.C U$35.C@1
N$75: D17.C R24.1 R35.2 R38.2 R54.1 U$13.1 U$14.P$4 U$29.C U$29.C@1
N$76: R49.2 U$10.3 U$34.E
N$77: R50.2 U$9.3 U$33.E
N$78: R51.2 U$18.3 U$32.E
N$79: R52.2 U$17.3 U$31.E
N$80: R56.2 U$12.3 U$30.E
N$81: R55.2 U$13.3 U$29.E
N$82: R53.2 U$16.3 U$35.E
N$83: R54.2 U$15.3 U$28.E
N$84: R57.1 R58.2
N$85: C34.1 R59.1
N$86: U$20.A U$21.C
N$87: U$21.A U$22.C
N$88: U$22.A U$23.C
N$89: U$24.C U$25.A
N$90: U$25.C U$26.A
N$91: U$26.C U$27.A
N$251: D8.A R29.1 R33.2 U$9.2 U$33.B
PWM5: PCB1.D5
PWM6: PCB1.D6
PWM9: OK1.1 PCB1.D9
RDBK1: FDBKHV.1 IC2.2 R3.1 U$3.4
RDBK3: FDBKHV.3 IC2.6 R9.1 U$3.6
RDBK4: C2.1 R6.2 R7.2 U$1.MOD U$3.7
RESET: CTIA.3 OK1.12
RESET1: IC3.12 R17.2 X5.6
SAMPLE: CTIA.2 OK1.14
SAMPLE1: IC3.11 R13.2 X5.7
SCL: IC1.3 PCB1.D3
SCL_OUT: IC1.6 R2.1 U$2.2 U$3.10
SDA: IC1.2 PCB1.D2
SDA_OUT: IC1.7 R1.1 U$2.3 U$3.9
VCC: C1.1 C4.1 IC1.8 POWERINTERFACE.2 R1.2 R2.2 U$1.VCC U$2.1 U$3.8
VIN: IC3.2 U$6.P$1
VOUT: IC4.1 R20.1 X5.8

## Tracks (layer width: path | path; a pad name or v marks a point on that pad's centre or on a via)
+5V  (1 unrouted)
  Top 1.422: R17.1 73.66,214.63 | 73.66,214.63 R13.1 55.37,214.63 51.82,213.11 33.53,213.11 27.94,204.98 25.04,204.98 X5.5 | IC5.1 73.66,214.63
+15V  (2 unrouted)
  Bottom 1.422: POWERINTERFACE.1 110.49,86.49 112.52,84.45 112.52,77.6 C7.1 | IC2.8 68.2,93.85 Q2.C
  Bottom 2.54: 106.3,123.06 93.22,136.14 20.79,136.14 Q1.C | POWERINTERFACE.1 106.14,123.16
+15V1  (1 unrouted)
  Top 1.422: IC3.14 77.47,191.77 75.08,194.16 X5.1 22.5,191.77 20.07,191.77 18.54,193.29 18.54,206.25 20.32,208.03 27.43,208.03 29.21,210.57 33.27,216.41 42.67,216.41 IC4.8
+15V2
  Bottom 1.016: 137.41,135.13 D11.C
  Bottom 1.422: 137.92,135.38 137.41,135.38
  Bottom 1.676: D11.C 144.53,135.13 K1.1 149.61,140.21 163.58,140.21 | 163.58,140.21 205.23,140.21 207.77,142.75 U$7.6 | 163.58,140.21 K1.9 | K1.8 163.58,140.21 | POWERGD.1 C25.1 D11.C | D11.C 137.92,135.38
-15V  (via drill 0.6)
  Top 1.422: IC2.4 52.2,84.96 v58.29,78.99
  Bottom 1.422: POWERINTERFACE.4 90.42,86.49 87,83.06 C5.1 v58.29,78.99
-15V1  (via drill 0.6)  (1 unrouted)
  Top 1.422: v25.09,202.39 25.09,202.44 28.7,202.44 29.46,203.45 34.8,210.82 49.02,210.82 50.29,210.06 IC4.4 50.29,207.26 53.09,204.47 IC3.9
  Bottom 1.422: X5.4 v25.09,202.39
A+5
  Bottom 1.016: PCB1.+5V 53.59,5.46 54.61,4.45 70.99,4.45 72.39,5.84 74.8,8.26 74.8,42.67 72.64,44.83 55.88,44.83 54.86,43.81 IC1.1
AGND  (via drill 0.5 pad 0.3)
  Bottom 1.422: PCB1.GND. 58.67,12.45 65.66,19.43 70.61,19.43 72.01,20.83 72.01,41.53 IC1.4 | PCB1.GND. 58.67,6.99 | 14.73,14.73 16.38,13.08 57.78,13.08 58.55,13.84 58.55,7.37 PCB1.GND.
  other vias: 9.02,14.35
  pour Bottom (isolate 1.422): -0.13,0.13 112.52,0.13 113.03,43.56 0.13,43.56
  pour Top (isolate 1.422): 0.13,43.56 113.03,43.56 112.52,0.13 0.25,-0.13
CTIA  (via drill 0.6)
  Top 1.422: U$3.5 53.72,72.14 52.83,73.03 v27.3,73.03
  Bottom 1.422: CTIA.4 22.48,77.85 v27.3,73.03
D7
  Bottom 1.016: OK1.5 14.99,33.02 18.03,29.97 30.99,29.97 PCB1.D7
D8
  Bottom 1.016: OK1.3 9.91,34.67 17.02,27.43 30.86,27.43 PCB1.D8
  Bottom 1.422: 35.69,22.61 PCB1.D8
ENSW
  Bottom 1.676: CONTROLGD1.1 D11.A 144.53,145.29 K1.16
ENSW2
  Bottom 1.422: CONTROLGD2.1 4.88,49.71 OK1.16
GND
  pour Bottom (isolate 1.422, no thermals): -0.13,139.7 114.3,139.7 114.3,46.48 0,46.48
  pour Top (isolate 1.422, no thermals): -0.13,139.7 114.3,139.7 114.3,46.48 0,46.48
GND1  (4 unrouted)
  Bottom 2.54: U$4.P$2 167.13,106.68 U$4.P$4 225.3,106.68 | 234.7,107.95 C8.2 C13.2 | 250.57,108.46 234.7,108.46 234.7,108.2 | 225.04,107.06 225.34,107.97 | 225.34,107.97 R8.E | 234.7,108.2 234.7,107.95 | 234.7,107.95 234.95,107.7 234.95,107.95 234.7,108.2 | 234.7,108.2 225.87,108.2 225.34,107.97 | R11.S 218.06,52.07 R11.E 195.33,52.07 | 195.33,52.07 163.83,52.07 163.83,35.05 U$5.P$2 | 195.33,52.07 U$5.P$4 200.91,30.99 C12.2 C15.2 C14.2 243.59,31.24 247.4,31.24 259.59,43.43 C10.2
  pour Bottom (isolate 1.422, no thermals): 116.59,120.4 175.51,120.14 175.01,1.27 116.84,1.02
GND2
  Bottom 0.61: 19.3,196.85 19.56,203.96 X5.9
  pour Bottom (isolate 1.422, no thermals): 16.26,183.64 16.26,238.25 114.3,238.25 114.3,183.64
GND3  (via drill 0.6)  (2 unrouted)
  Top 1.016: v228.09,169.67 228.09,169.93 229.36,171.2 245.91,171.2 U$11.P$6 | U$8.P$6 129.97,172.39 GND15.TP | U$14.P$6 v154.36,172.39 | U$19.P$6 209.73,171.12 v201.42,162.81 | 248.4,233.17 U$27.C 243.6,233.16 v243.33,233.43 240.79,237.74 R58.1 | U$23.A v164.58,232.91 169.67,238 C34.2
  Top 1.422: K1.6 v158.5,128.27 | K1.11 v158.5,151.89
  Bottom 1.016: 207.77,137.16 207.52,137.16 U$7.3 | 227.84,143.51 228.09,143.76 v228.09,169.67 243.33,184.91 v243.33,233.43 | 147.83,152.4 147.57,152.65 147.57,165.61 v154.36,172.39 164.59,182.63 164.59,228.09 v164.58,232.91 | v201.42,162.81 201.42,153.16
  Bottom 1.422: 273.81,163.58 274.07,163.83
  Bottom 1.676: 216.15,146.56 222.5,146.56 | 208.79,139.95 207.77,138.94 207.77,137.16 U$7.3 207.77,135.64
  Bottom 3.81: 274.12,168.6 274.09,149.1 | 274.09,149.1 274.57,144.53 | C26.2 122.68,151.89 | C27.2 274.07,163.83 274.07,149.1 274.09,149.1
  pour Bottom (isolate 1.676, no thermals): 116.84,121.92 116.84,155.19 281.94,155.19 281.94,121.92
N$1
  Bottom 1.422: R7.1 53.47,74.93 46.74,68.2 U$2.6
N$2
  Bottom 1.016: OK1.4 R14.1
N$3
  Bottom 1.422: C3.1 R3.2
N$4
  Bottom 2.184: CONTROLHV.1 38.45,129.54 Q1.E
N$5
  Bottom 2.184: CONTROLHV.3 81,129.41 Q2.E
N$6
  Bottom 1.016: OK1.6 R15.1
N$7
  Bottom 1.016: OK1.2 R18.1
N$8  (5 unrouted)
  Bottom 2.54: C9.1 195.33,81.03 U$4.P$3 | D1.A 239.78,80.52
N$9
  Bottom 2.54: U$5.P$3 213.11,11.18 R5.1 C12.1 C15.1 238.76,20.83 | 238.76,20.83 C14.1 259.33,20.83 C10.1 | D2.A 239.52,20.07 238.76,20.83
N$10
  Bottom 1.422: R8.A 220.85,96.27 R4.2 199.64,96.27 169.06,65.68 158.09,65.63 143.82,65.63 FDBKHV1.1
N$11
  Bottom 1.422: R11.A 225.68,57.78 188.98,57.97 | 188.98,57.97 188.42,57.71 | FDBKHV1.3 188.42,57.76 188.98,57.97 | 225.81,51.94 225.81,38.86 R5.2
  Bottom 2.54: 225.81,51.94 R11.A
N$12
  Top 1.422: U$1.SET 90.04,65.28 98.81,56.52 R16.E
N$13
  Top 1.422: U$1.OUT 97.54,70.36 100.58,67.31 105.21,67.31 X1.1
N$14  (1 unrouted)
  Bottom 2.54: D1.C 260.1,73.41
N$15
  Bottom 2.184: U$4.P$1 C17.1 125.22,73.66 CONTROLHV1.1
N$16
  Bottom 1.422: R10.2 42.42,80.52 50.67,88.77 IC2.3
N$17
  Bottom 2.184: CONTROLHV1.3 125.22,28.45 133.35,20.32 C18.1 158.24,20.32 U$5.P$1
N$18
  Bottom 1.422: R12.2 47.75,76.2 57.66,86.11 59.94,86.11 IC2.5
N$19
  Bottom 1.422: IC2.1 52.07,93.73 49.02,93.73 46.74,91.44 C3.2 39.62,92.61 Q1.B
N$20
  Bottom 1.422: C6.1 R9.2
N$21
  Bottom 1.422: IC2.7 C6.2 87.25,104.14 87.54,104.43 96.31,113.2 Q2.B
N$23  (1 unrouted)
  Bottom 2.54: D2.C 260.1,11.43 260.1,11.68
N$24
  Bottom 1.422: R10.1 U$2.9
N$25
  Bottom 1.422: R12.1 37.34,68.45 U$2.7
N$27
  Top 1.422: SW2.1 IC3.6
N$28
  Top 1.422: SW2.2 IC3.5
N$29
  Top 1.422: SW2.3 IC3.4
N$30  (via drill 0.6)
  Top 1.422: SW2.6 SW2.5 SW2.4 | v107.95,198.12 106.68,196.85 IC3.3
  Bottom 1.422: SW2.4 v107.95,198.12
N$31
  Top 1.422: IC3.10 R19.2
N$32
  Top 1.422: R19.1 R20.2 IC4.2
N$33  (via drill 0.6)
  Top 1.422: R21.1 67.82,219.71 65.02,222.5 R22.2 54.86,222.5 v54.1,221.74 | v47.75,205.23 IC4.3
  Bottom 1.422: v54.1,221.74 54.1,205.23 v47.75,205.23
N$34
  Top 1.422: R21.2 81.03,217.17 IC5.2
N$35
  Bottom 1.676: X4.1 210.31,132.33 | U$7.2 205.23,132.33 210.31,132.33 | 210.31,132.33 U$7.4
N$36
  Top 1.016: U$7.7 205.49,144.27 205.49,145.29 190.25,160.53 168.91,160.53 C29.1
N$37
  Top 1.016: U$7.5 210.57,144.27 210.57,150.37 219.71,159.51 C31.1
N$38
  Bottom 1.676: 202.69,135.89 U$7.1 202.69,133.35 153.42,133.35 K1.4
N$39
  Bottom 1.676: K1.13 153.42,147.07 199.64,147.07 U$7.8
N$40
  Top 1.016: U$8.P$2 145.29,174.24 149.86,178.82 161.22,178.82 C21.1
N$41
  Top 1.016: U$8.P$3 141.36,178.01 C22.1
N$42  (via drill 0.6)
  Top 1.016: 246.19,177.55 C23.1 246.06,177.55 v242.57,177.55 | U$11.P$2 251.71,172.97 250.7,171.96 250.7,168.91 249.68,167.89 v243.59,167.89
  Bottom 1.016: v243.59,167.89 242.32,167.89 240.79,169.42 240.79,175.77 v242.57,177.55
N$43
  Top 1.016: 261.43,177.8 C24.1 261.62,176.28 260.17,174.83 U$11.P$3
N$44
  Top 1.016: C23.2 246.13,183.9 D6.C 246.13,184.91 245.11,185.93 243.08,185.93 D8.C 240.52,186.52 R33.1
N$45
  Top 1.016: C24.2 261.37,179.83 261.37,181.86 263.4,183.9 D14.C 263.4,184.91 262.38,185.93 260.35,185.93 D12.C 259.76,186.44 256.54,186.44 255.27,187.71 R34.1
N$46
  Top 1.016: 141.99,185.93 138.43,185.93 D5.A | 141.99,185.93 142.49,185.93 D7.A 146.07,186.78 R32.1 | C22.2 142.49,185.42 141.99,185.93
N$47  (1 unrouted)
  Top 1.016: 138.43,228.09 138.43,224.03 R23.2 138.68,222.5 144.85,216.34 R56.1 | 134.37,192.02 134.37,185.93 D5.C 133.97,185.65 U$8.P$4 | 134.37,192.02 128.27,192.02 123.19,197.1 C26.1 | 134.37,192.02 R28.2 | 138.43,228.09 123.7,228.09 123.19,227.33 | 138.43,228.09 U$20.C
  Bottom 1.016: 122.68,226.82 122.17,227.08 HV1.TP 122.94,227.33
  Bottom 3.81: C26.1 122.68,226.82
N$48  (via drill 0.6)  (1 unrouted)
  Top 1.016: 251.21,193.55 251.21,184.66 D6.A 251.71,184.57 v251.71,181.61 | 251.21,193.55 252.73,193.55 257.56,198.37 257.56,201.42 | 257.56,226.57 257.56,219.71 | 257.56,219.71 257.56,213.87 | 257.56,213.87 257.56,201.42 | 257.56,226.57 R26.2 | R26.2 | R25.1 257.56,226.57 | U$11.P$5 248.16,172.97 v251.71,176.53 | R26.2 | 257.49,218.88 257.56,219.71 | R50.1 257.56,201.42 | U$10.1 267.72,203.71 268.99,204.98 268.99,213.11 268.22,213.87 U$34.C@1 257.56,213.87 | 251.21,193.55 R29.2
  Bottom 1.016: v251.71,176.53 v251.71,181.61
N$49  (via drill 0.6)  (1 unrouted)
  Top 1.016: R24.2 157.48,224.03 157.48,227.84 149.35,227.84 149.35,195.07 | 153.67,192.02 153.67,186.94 152.65,185.93 | 152.65,185.93 D3.C | 133.35,210.06 133.35,199.9 U$12.1 133.86,196.85 135.38,195.07 149.35,195.07 | 133.35,210.06 133.35,224.03 R23.1 | 153.67,192.02 152.4,192.02 149.35,195.07 | 153.67,192.02 R27.2 | 157.71,222.73 157.73,223.77 157.48,223.77 R24.2 | U$8.P$5 136.4,174.24 137.67,175.51 137.67,180.85 v139.19,182.37 | v149.1,184.15 150.88,184.15 152.65,185.93 | R55.1 160.78,220.99 R24.2 | U$30.C@1 133.35,210.06
  Bottom 1.016: v139.19,182.37 140.97,184.15 v149.1,184.15
N$50  (via drill 0.6)
  Top 1.016: R31.2 165.86,189.99 161.8,189.99 D4.C 161.29,191.26 160.27,192.28 v158.75,192.28 R27.1 | v158.75,197.61 155.17,197.64 U$13.2 155.19,203.71 158.44,206.96 U$29.B
  Bottom 1.016: v158.75,197.61 v158.75,192.28
N$51  (1 unrouted)
  Top 1.016: R31.1 165.86,186.94 161.8,186.94 D4.A 160.78,185.93 157.73,185.93 D3.A | C21.2 161.54,185.93
N$52
  Top 1.016: R34.2 255.27,189.99 259.33,189.99 D12.A 259.84,191.01 262.38,193.55 R30.1 262.64,193.55 260.35,195.83 U$10.2 260.35,205.49 264.92,210.06 264.92,212.32 U$34.B
N$53  (via drill 0.6)
  Top 1.016: R28.1 v139.95,192.02 142.49,192.02 142.49,191.77 | 142.49,191.77 D7.C | R32.2 147.32,190.5 146.05,191.77 142.49,191.77 | v139.95,197.36 139.93,197.38 U$12.2 136.4,202.44 140.16,206.45 U$30.B
  Bottom 1.016: v139.95,197.36 v139.95,192.02
N$54  (via drill 0.6)  (1 unrouted)
  Top 1.016: 267.46,225.81 R26.1 | 268.61,192.15 273.56,197.1 C27.1 | 268.61,192.15 268.48,192.02 268.48,184.91 268.45,184.66 | 268.45,184.66 D14.A | v268.22,178.31 268.22,184.44 268.45,184.66 | 266.45,193.61 R30.2 266.95,193.55 | 266.95,193.55 267.21,193.55 268.61,192.15 | v255.02,178.31 250.7,178.31 247.14,174.75 246.06,174.75 U$11.P$4 | R49.1 268.73,195.33 266.95,193.55 | 267.97,227.58 267.97,232.91 U$24.A
  Top 1.422: HV2.TP 267.97,227.58
  Bottom 1.016: 274.07,228.09 HV2.TP | v268.22,178.31 v255.02,178.31
  Bottom 1.676: 274.32,227.58 HV2.TP
  Bottom 3.81: HV2.TP C27.1
N$55
  Top 1.016: U$14.P$2 192.21,174.24 C28.1
N$56
  Top 1.016: U$14.P$3 177.05,176.1 C30.1
N$57
  Top 1.016: 179.41,186.31 179.07,185.93 176.02,185.93 D17.A | 179.41,186.31 D19.A 183.15,186.78 R40.1 | C30.2 179.83,185.88 179.41,186.31
N$58  (via drill 0.6)  (1 unrouted)
  Top 1.016: U$15.1 170.94,210.06 | 170.94,210.06 170.94,219.96 173.99,223.01 R35.1 175.01,224.03 182.37,224.03 | 188.21,192.79 188.21,185.93 188.27,185.81 | 182.37,224.03 182.37,195.07 184.66,192.79 185.93,192.79 | 188.27,185.81 D16.C | 182.37,224.03 188.21,224.03 R36.2 | R37.2 188.21,192.79 | U$14.P$5 171.7,174.24 172.97,175.51 172.97,179.58 v174.5,181.1 | v184.66,184.4 186.86,184.4 188.27,185.81 | 185.93,192.79 188.21,192.79 | R53.1 185.93,192.79 | U$28.C@1 170.94,210.06
  Bottom 1.016: v174.5,181.1 175.51,181.1 178.05,183.64 183.9,183.64 v184.66,184.4
N$59
  Top 1.016: R39.2 200.68,191.43 D18.C 193.57,191.43 R37.1 192.21,197.62 U$16.2 192.28,210.03 U$35.B
N$60
  Top 1.016: R39.1 201.42,187.96 197.36,187.96 D18.A 197.1,185.42 | 197.1,185.42 193.04,185.42 D16.A | C28.2 197.1,185.42
N$61
  Top 1.016: R40.2 183.13,191.01 180.09,191.01 D19.C 178.73,192.28 173.48,192.28 | R38.1 173.48,192.28 | 173.48,192.28 U$15.2 173.48,204.47 176.73,207.72 U$28.B
N$62
  Top 1.016: U$14.P$1 172.87,169.1 R41.1 168.66,169.16 148.59,169.16 145.29,172.47 141.44,172.47 U$8.P$1
N$63
  Top 1.016: C29.2 168.91,163.58 168.91,166.62 R41.2
N$64  (via drill 0.6)
  Top 1.016: U$19.P$2 217.42,172.97 216.41,171.96 216.41,169.16 215.65,168.4 v211.33,168.4 | v209.3,178.56 212.02,178.56 C32.1
  Bottom 1.016: v211.33,168.4 210.57,168.4 207.77,171.2 207.77,177.04 v209.3,178.56
N$65
  Top 1.016: U$19.P$3 224.04,174.83 C33.1
N$66
  Top 1.016: R46.1 207.52,187.96 209.04,186.44 D24.C 211.58,185.93 213.61,185.93 214.63,184.91 D22.C 215.65,183.9 212.6,180.85 C32.2
N$67
  Top 1.016: R47.1 223.77,187.96 225.81,187.96 226.82,186.94 D25.C 227.84,185.93 228.85,184.91 | 228.85,184.91 230.89,184.91 D23.C | C33.2 227.33,183.39 228.85,184.91
N$68  (1 unrouted)
  Top 1.016: 220.73,193.04 220.73,184.91 D22.A 219.71,184.49 219.71,178.56 214.12,172.97 U$19.P$5 | 223.27,223.01 217.68,223.01 R42.1 217.68,224.03 | 223.27,223.01 225.3,223.01 228.47,226.19 | 228.47,226.19 R43.2 | 217.93,192.85 R44.2 220.47,192.79 220.73,193.04 | 228.47,226.19 228.85,225.81 228.85,223.77 231.14,221.49 231.14,216.66 | 220.73,193.04 220.73,198.37 | 220.73,198.37 R52.1 | 220.73,198.37 223.27,200.91 223.27,223.01 | 231.14,216.66 U$18.1 | U$32.C@1 231.39,216.41 231.14,216.66
N$69
  Top 1.016: 230.63,193.55 229.36,193.55 227.84,192.02 D25.A 227.24,191.26 224.54,191.26 223.45,190.18 R47.2 | R45.1 230.63,193.55 | 230.63,193.55 228.6,195.58 U$18.2 232.92,203.96 237.49,208.53 237.49,214.86 U$32.B
N$70
  Top 1.016: R48.1 219.46,170.98 U$19.P$1 222.83,171.12 230.89,163.07 254.51,163.07 257.05,165.61 257.05,170.18 256.03,171.2 253.45,171.2 U$11.P$1
N$71
  Top 1.016: C31.2 R48.2
N$72
  Top 1.016: R44.1 215.65,193.04 213.61,193.04 211.58,191.01 | 211.58,191.01 D24.A 208.28,190.92 207.52,191.01 | 211.58,191.01 209.04,191.01 | 209.04,191.01 208.09,191.01 R46.2 | 209.04,191.01 U$17.2 214.12,203.2 217.63,206.71 U$31.B
N$73  (via drill 0.6)  (1 unrouted)
  Top 1.016: R45.2 234.95,193.04 234.95,184.91 D23.A 235.46,184.57 v235.46,180.59 | R43.1 241.3,226.57 | 241.3,226.57 R25.2 | 241.3,226.57 241.3,206.25 | 241.3,206.25 241.3,199.9 | 241.3,199.9 241.3,197.1 237.74,193.55 R45.2 | 234.19,193.74 R45.2 | U$19.P$4 213.18,174.83 v216.66,178.31 | R45.2 234.7,193.87 237.49,193.8 | R51.1 241.05,199.64 241.3,199.9 | U$33.C@1 248.41,216.41 248.41,206.76 U$9.1 241.55,206.5 241.3,206.25
  Bottom 1.016: v216.66,178.31 217.42,179.07 233.93,179.07 v235.46,180.59
N$74  (1 unrouted)
  Top 1.016: 200.66,224.03 211.58,224.03 R42.2 211.58,223.01 211.58,212.85 | 200.66,224.03 194.31,224.03 R36.1 194.82,223.02 194.82,222.25 186.44,213.87 186.44,211.58 | 200.66,224.03 OUT.TP | U$17.1 211.58,212.85 | R57.2 200.91,237.74 OUT.TP | OUT.TP R59.2 | 186.44,211.58 186.44,206.25 189.74,202.95 U$16.1 | U$35.C U$35.C@1 186.44,211.58 | U$31.C@1 211.58,212.85
N$75  (via drill 0.6)  (2 unrouted)
  Top 1.016: 152.65,210.82 152.65,197.1 154.69,195.07 163.58,195.07 | 152.65,210.82 152.65,223.77 R24.1 | 170.94,185.93 170.94,192.02 | 170.94,185.93 D17.C | v168.91,228.35 168.91,224.03 R35.2 168.91,223.01 163.58,223.01 163.58,195.07 | 170.94,192.02 167.89,195.07 163.58,195.07 | 170.94,192.02 R38.2 | U$14.P$4 168.77,183.76 170.94,185.93 | R54.1 179.64,203.64 v179.58,203.71 | U$29.C@1 152.91,210.57 152.65,210.82
  Bottom 1.016: v168.91,228.35 179.58,228.35 v179.58,203.71
N$76
  Top 1.016: U$10.3 R49.2 270.76,200.59 270.76,214.12 269.52,215.37 U$34.E
N$77
  Top 1.016: U$9.3 R50.2 252.29,203.52 255.02,206.25 255.02,217.17 254.25,217.93 251.94,217.93 U$33.E
N$78
  Top 1.016: U$18.3 231.14,200.91 232.41,199.64 R51.2 235.46,199.71 235.46,201.93 239.52,205.99 239.52,217.93 238.99,217.91 U$32.E
N$79
  Top 1.016: U$17.3 211.58,199.14 212.34,198.37 R52.2 215.14,198.44 215.14,199.9 220.47,205.23 220.47,212.85 218.92,214.35 U$31.E
N$80
  Top 1.016: U$12.3 141.99,199.9 | 141.99,199.9 144.46,199.9 R56.2 | U$30.E 142.47,211.56 142.49,211.58 142.49,200.41 141.99,199.9
N$81
  Top 1.016: U$13.3 160.97,200.41 160.85,212.1 | 160.85,212.1 R55.2 | U$29.E 160.82,212.06 160.85,212.1
N$82  (via drill 0.6)
  Top 1.016: U$16.3 194.82,212.34 194.03,213.11 U$35.E | R53.2 185.93,202.95 184.91,203.96 v184.91,204.98
  Bottom 1.016: v184.91,204.98 189.99,204.98 U$16.3
N$83
  Top 1.016: R54.2 179.51,199.14 U$15.3 175.77,199.39 175.77,203.45 179.58,207.26 179.58,211.58 178.54,211.56 U$28.E
N$84
  Top 1.016: R57.1 R58.2
N$85
  Top 1.016: R59.1 C34.1
N$86
  Top 1.016: U$20.A U$21.C
N$87
  Top 1.016: U$21.A U$22.C
N$88
  Top 1.016: U$22.A U$23.C
N$89
  Top 1.016: U$24.C U$25.A
N$90
  Top 1.016: U$25.C U$26.A
N$91
  Top 1.016: U$27.A 248.93,238.01 249.17,238.25 255.01,238.25 U$26.C
N$251
  Top 1.016: R33.2 239.01,189.99 243.08,189.99 D8.A 243.25,190.92 245.87,193.55 246.13,193.55 | R29.1 246.13,193.55 | 246.13,193.55 244.86,193.8 244.86,203.96 U$9.2 249.68,203.96 251.92,206.2 U$33.B
PWM9
  Bottom 1.016: OK1.1 4.83,35.69 15.75,24.77 30.99,24.77 PCB1.D9
RDBK1
  Top 1.422: U$3.4 56.26,74.68 R3.1
  Bottom 1.422: R3.1 44.7,86.36 49.66,91.31 IC2.2 54.23,91.31 54.99,92.08 54.99,97.28 53.19,99.08 FDBKHV.1
RDBK3
  Top 1.422: U$3.6 53.59,63.25 53.59,66.29 55.75,68.45 65.91,68.45 66.93,69.47 66.93,83.95 R9.1
  Bottom 1.422: R9.1 69.34,87.25 67.69,88.9 60.2,88.9 IC2.6 57.91,88.77 57.28,89.41 57.28,97.41 61.11,101.11 FDBKHV.3
RDBK4
  Bottom 1.422: U$3.7 56.26,65.28 57.28,66.29 67.82,66.29 71.25,62.87 79.38,62.87 80.01,63.5 C2.1 R6.2 | R6.2 R7.2 | R6.2 U$1.MOD
RESET
  Bottom 1.422: CTIA.3 14.17,74.35 15.88,72.64 15.88,53.47 14.99,52.58 OK1.12
RESET1
  Top 0.61: X5.6 46.74,195.58 48.01,196.85 R17.2
  Top 1.422: IC3.12 R17.2
SAMPLE
  Bottom 1.422: OK1.14 9.91,52.32 12.57,54.99 12.57,71.88 10.16,74.3 10.16,77.8 CTIA.2
SAMPLE1
  Top 0.61: R13.2 47.75,199.39 46.74,198.37 X5.7
  Top 1.422: R13.2 IC3.11
SCL
  Bottom 1.016: IC1.3 59.94,36.83 48.51,25.4 48.51,23.37 48.39,23.24 48.39,22.61 PCB1.D3
SCL_OUT
  Top 1.422: U$2.2 32.26,58.29 44.58,45.97 59.94,45.85 60.07,49.28 IC1.6
  Bottom 1.422: U$3.10 R2.1 63.88,51.82 59.94,51.82 IC1.6
SDA
  Top 1.016: IC1.2 57.4,31.11 51.18,24.89 51.18,22.61 PCB1.D2
SDA_OUT
  Top 1.422: U$2.3 34.8,59.18 42.29,51.69 57.28,51.69 57.4,51.56 IC1.7
  Bottom 1.422: IC1.7 57.4,54.36 R1.1 61.34,55.24 U$3.9
VCC
  Top 1.422: C4.1 69.6,57.78 66.67,60.71 58.8,60.71 U$3.8
  Bottom 1.422: POWERINTERFACE.2 102.18,77.29 C1.1 102.11,74.04 91.31,74.04 91.19,67.82 | 91.19,67.82 U$1.VCC | U$3.8 58.8,58.55 R2.2 52.7,58.55 R1.2 47.75,49.4 | U$2.1 29.72,56.64 36.96,49.4 47.75,49.4 | IC1.8 54.61,49.4 47.75,49.4 | 91.19,67.82 91.19,61.59 87.38,57.78 C4.1
VIN
  Top 1.422: U$6.P$1 83.82,193.29 84.84,194.31 IC3.2
VOUT
  Top 0.61: X5.8 32.77,200.91 33.78,200.91 R20.1
  Top 1.422: IC4.1 36.32,208.03 35.05,206.76 R20.1

## Text on the board
tPlace: Requires conformal coating